# Altium PCB PCB.PcbDoc
Units mm, origin at the board's own origin, x right, y up, seen from the top; angles counter-clockwise.
Board outline 22.01 x 11.01 mm, 2 copper layers (Top Layer, Bottom Layer), stack 0.533 mm thick; 2 components, 6 nets, 34 pads, 12 vias.
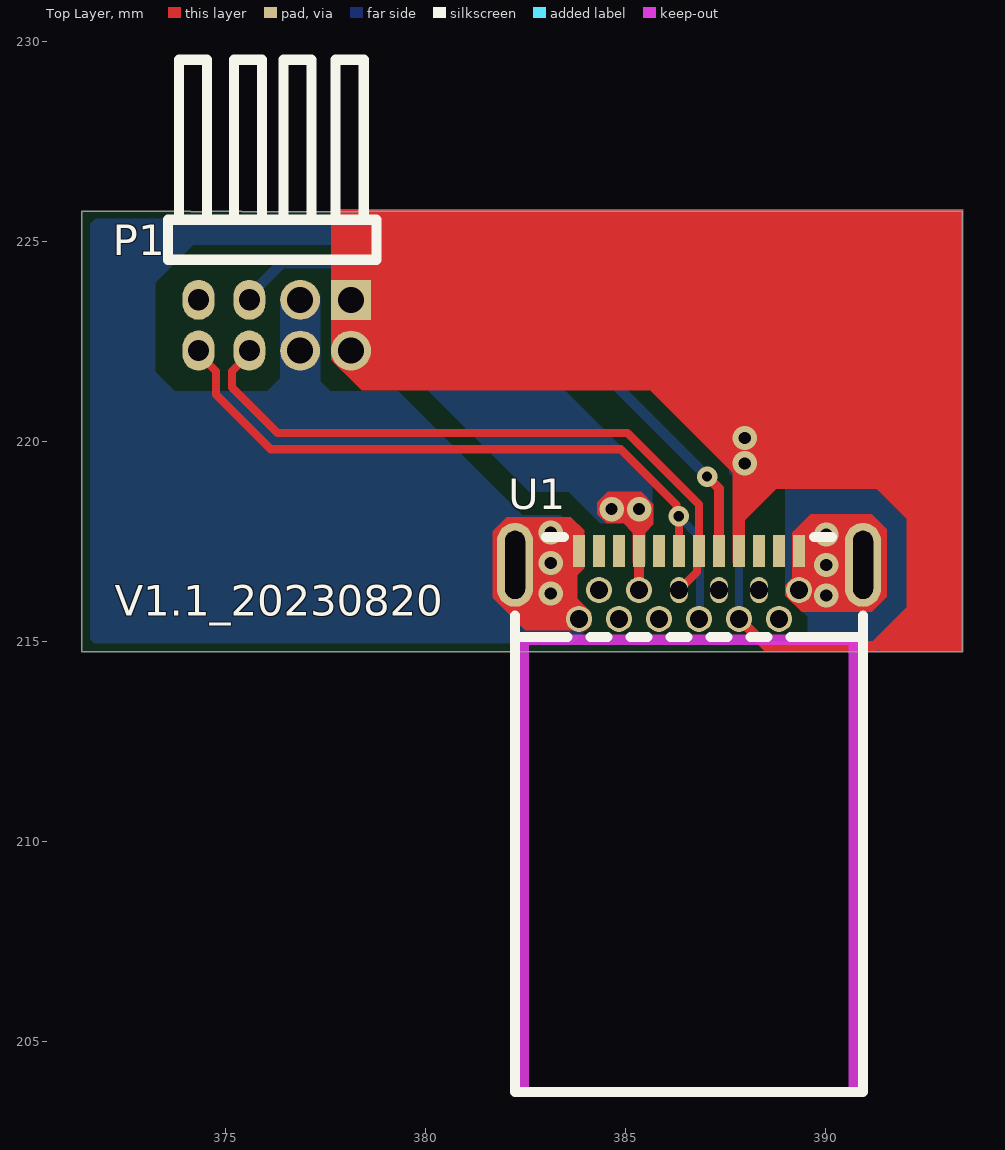
[diagram p0: Top Layer view]
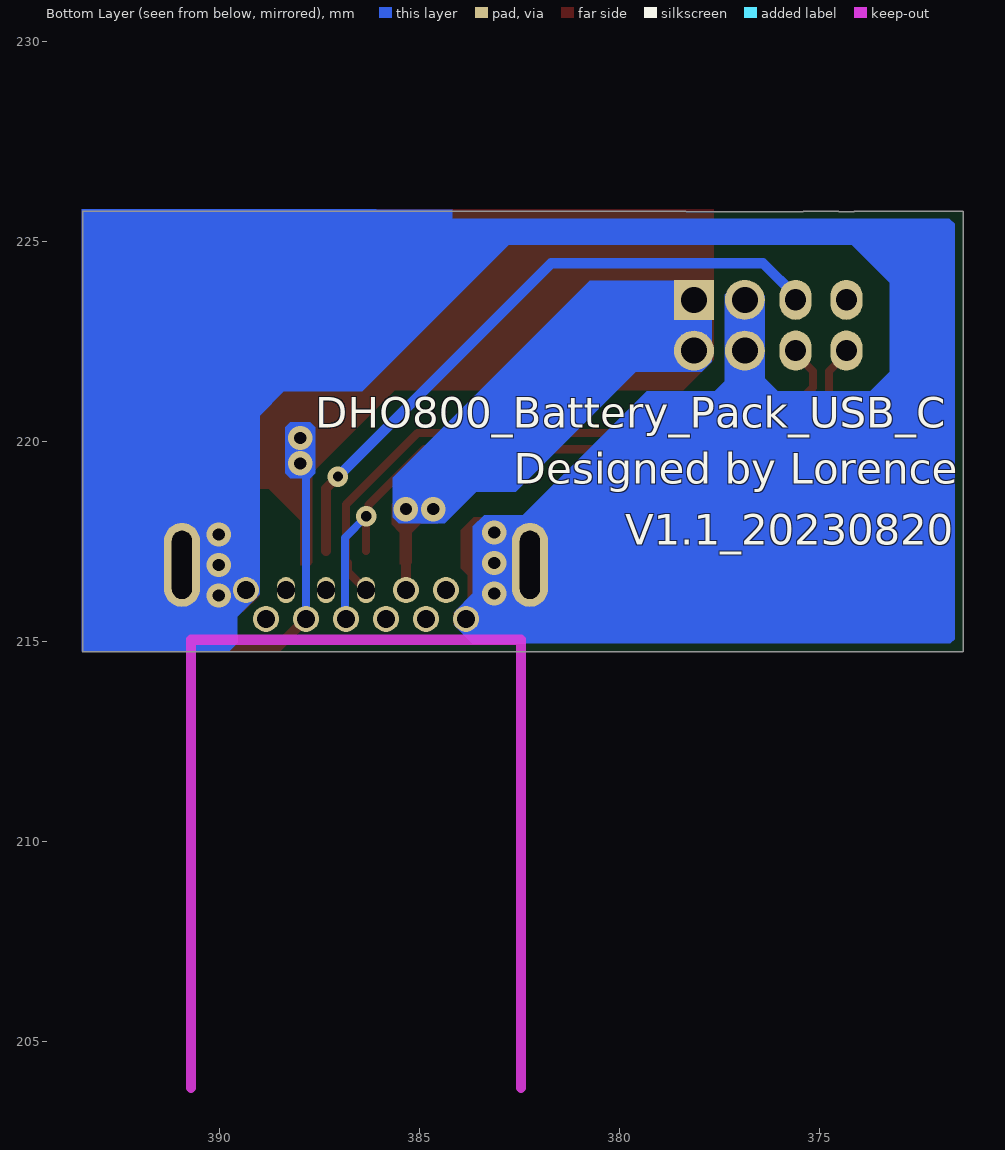
[diagram p1: Bottom Layer view, seen from below]

## Layer stack, top to bottom
Top Solder: solder mask 0.0102, Solder Resist, Dk 3.5
Top Layer: signal copper 0.0356
Dielectric 2: prepreg 0.0711, PP-006, Dk 4.1
Dielectric 1: dielectric 0.32, FR-4, Dk 4.8
Dielectric 3: prepreg 0.0711, PP-006, Dk 4.1
Bottom Layer: signal copper 0.0356
Bottom Solder: solder mask 0.0102, Solder Resist, Dk 3.5

## Board outline
371.412,214.757 ccw(c371.419,214.757) 371.419,214.75 393.419,214.75 ccw(c393.419,214.757) 393.425,214.757 393.425,225.751 ccw(c393.419,225.751) 393.419,225.757 378.341,225.757 ccw(c378.341,225.751) 378.335,225.753 375.408,225.753 ccw(c375.401,225.751) 375.401,225.757 374.531,225.757 ccw(c374.531,225.751) 374.525,225.753 374.137,225.753 ccw(c374.131,225.751) 374.131,225.757 371.419,225.757 ccw(c371.419,225.751) 371.412,225.751

## Design rules (kind name [scope] priority, off if disabled: settings)
Clearance [All] p1: gap=0.102 ignorepadtopadclearanceinfootprint=FALSE
DiffPairsRouting [All] p1: maxlimit=0.203 minlimit=0.203 mostfreqgap=0.203 toplayer_minwidth=0.152 toplayer_maxwidth=0.203 toplayer_prefwidth=0.203 bottomlayer_minwidth=0.152 bottomlayer_maxwidth=0.203 bottomlayer_prefwidth=0.203 maxuncoupledlength=12.7
HoleSize [All] p1: absolutevalues=TRUE maxlimit=25.4 minlimit=0.025 maxpercent=80.000 minpercent=20.000
HoleToHoleClearance [All] p1: gap=0 allowstackedmicrovias=TRUE
MinimumSolderMaskSliver [All] p1: minsoldermaskwidth=0
PlaneConnect [All] p1: planeconnectstyle=Direct reliefexpansion=0.508 reliefentries=4 reliefconductorwidth=0.254 reliefairgap=0.254
PolygonConnect [All] p1: connectstyle=Relief reliefconductorwidth=0.254 reliefentries=4 polygonreliefangle="90 Angle" airgapwidth=0.254
RoutingVias [All] p1: holewidth=0.254 width=0.508 viastyle="Through Hole" minholewidth=0.254 minwidth=0.508 maxholewidth=12.7 maxwidth=12.7
SilkToSilkClearance [All] p1: silktosilkclearance=0
SilkToSolderMaskClearance [IsPad] p1: minsilkscreentomaskgap=0 clearancetoexposedcopper=TRUE
SolderMaskExpansion [All] p1: expansion=0.102 istentingtop=FALSE
Width [All] p1: maxlimit=25.4 minlimit=0.203 preferedwidth=0.254
23 further rules are at their usual default settings.

## Classes and differential pairs
differential pair BUSB: +BUSB_P -BUSB_N

## Components (designator, comment, footprint, x,y, rotation, side; value= is the part's Value field where it differs from the comment)
P1 "X1321WR-2x07J-C40D18" HDR-TH_8P-P1.27-L 376.236,222.911 r180 top locked
U1 "U261-241N-4BC2LS" USB-C-SMD_XKB_U261-241N-4BC2LS 386.592,216.42 r0 top locked

## Footprints (in the part's own frame and the unit in brackets; to place one, negate y for a bottom-side part, rotate by r counter-clockwise, add the part's x,y. Pads: shape width x height; smd on the part's side, far side on the other; paste and mask are expansions set on the pad)
HDR-TH_8P-P1.27-L [mm]
  rect 1x1 hole 0.65: 1(-1.905,-0.635)
  round 1 hole 0.65: 2(-1.905,0.635) 3(-0.635,-0.635) 4(-0.635,0.635)
  oval 0.8x1 hole 0.53: 5(0.635,-0.635) 6(0.635,0.635) 7(1.905,-0.635) 8(1.905,0.635)
  silkscreen extent -2.54,-6.63 2.67,-1.63
USB-C-SMD_XKB_U261-241N-4BC2LS [mm]
  oval 0.9x2.1 hole 0.5 slot 1.7 at 90 deg paste+0 mask+0.05: 25(-4.35,0.5) 26(4.35,0.5)
  rect 0.3x0.8 smd paste-100 mask+0.05: A1(2.75,0.85) A2(2.25,0.85) A3(1.75,0.85) A4(1.25,0.85) A5(0.75,0.85) A6(0.25,0.85) A7(-0.25,0.85) A8(-0.75,0.85) A9(-1.25,0.85) A10(-1.75,0.85) A11(-2.25,0.85) A12(-2.75,0.85)
  round 0.65 hole 0.45 paste+0 mask+0.05: B1(-2.75,-0.85) B3(-1.75,-0.85) B5(-0.75,-0.85) B7(0.25,-0.85) B9(1.25,-0.85) B11(2.25,-0.85)
  round 0.65 hole 0.45 copper offset 0,0 paste+0 mask+0.05: B2(-2.25,-0.13) B4(-1.25,-0.13) B12(2.75,-0.13)
  oval 0.45x0.65 hole 0.45 copper offset 0,0 paste+0 mask+0.05: B6(-0.25,-0.13) B8(0.75,-0.13) B10(1.75,-0.13)
  Keep-Out Layer lines w0.254: -4.125,-1.37 -4.125,-12.575 -4.125,-1.37 ; -4.125,-1.37 4.12,-1.37 ; -4.125,-1.37 4.12,-1.37 ; 4.12,-1.37 4.12,-12.575 4.12,-1.37
  silkscreen extent -4.35,-12.68 4.35,1.2

## Part data
P1: library part 双排插针, "双排弯针2*4P", Current Rating (Max)=1A, JLCPCB Part Class="Extended Part", LCSC Part Name="1.27mm 2x7P 弯插 方针", Manufacturer="XKB Connectivity(中国星坤)", Operating Temperature Range=-40℃~+105℃, Voltage Rating (Max)=250V, Welding Temperature (Max)=260℃, Add into BOM=yes, Circluar Pins/Square Pins=方针, Contact Material=黄铜, Contact Plating=金, Convert to PCB=yes, Device=X1321WR-2x07J-C40D18, Insulation Height=1mm, Length of End Connection Pin=-, Length of Mating Pin=4mm, Manufacturer Part=X1321WR-2x07J-C40D18, Mounting Type=弯插, Name=X1321WR-2x07J-C40D18, Number of Pins=14, Number of Rows=2, Pin Structure=2x7P, Pitch=1.27mm, Row Spacing=1.27mm, Supplier=LCSC, Supplier Footprint=插件,P=1.27mm, Supplier Part=C2881827, Symbol=X1321WR-2X07J-C40D18
U1: "USB C公头", Current Rating - Power (Max)=5A, JLCPCB Part Class="Extended Part", LCSC Part Name="Type-C 公头 沉板", Manufacturer="XKB Connectivity(中国星坤)", Operating Temperature Range=-40℃~+85℃, Welding Temperature (Max)=260℃, Add into BOM=yes, Connector Type=Type-C, Contact Material=铜合金, Contact Plating=金, Convert to PCB=yes, Device=U261-241N-4BC2LS, Gender=公头, Manufacturer Part=U261-241N-4BC2LS, Mounting Style=沉板, Name=U261-241N-4BC2LS, Number of Contacts=24, Number of Ports=1, Standard="USB 3.1", Supplier=LCSC, Supplier Footprint=SMD, Supplier Part=C2880648, Symbol=U261-241N-4BC2LS

## Via types
v1: diameter 0.61, hole 0.305, Top Layer to Bottom Layer, tented both sides, 10 vias
v2: diameter 0.508, hole 0.254, Top Layer to Bottom Layer, tented both sides, 2 vias

## Nets (pads, with @x,y where several pads share a name; then routed paths per layer and width w, separated by ;. In a path a pad name is that pad's centre, name@x,y a point inside that pad or via, vN(x,y) a via of type N, cw(c..) or ccw(c..) an arc to the next point about the centre after c; other vN are vias at no path point)
BUSB_N: P1.8 U1.A7 U1.B7 | length 17.9
  Top Layer w0.203: P1.8 374.331,222.191 374.763,221.759 374.763,221.182 376.133,219.812 384.884,219.812 386.276,218.42 386.276,218.194 386.338,218.131 386.338,217.273 U1.A7
  Bottom Layer w0.203: v2(386.334,218.135) 386.87,217.599 386.87,215.598 U1.B7
BUSB_P: P1.6 U1.A6 U1.B6 | length 16.3
  Top Layer w0.203: P1.6 375.601,222.191 375.169,221.759 375.169,221.35 376.301,220.218 385.052,220.218 386.842,218.428 U1.A6@386.842,217.019 ; U1.B6 386.795,216.742 386.795,216.972 U1.A6@386.837,217.014
CC3: P1.5 U1.A5 | length 16.2
  Top Layer w0.254: P1.5 P1.5@375.601,223.646 ; v2(387.045,219.126) 387.342,218.829 U1.A5
  Bottom Layer w0.254: P1.5 375.601,223.646 376.414,224.46 381.711,224.46 v2(387.045,219.126)
CC4: P1.7 | length 0
  Top Layer w0.254: P1.7@374.305,223.52 P1.7
GND: P1.3 P1.4 U1.25 U1.26 U1.A1 U1.A12 U1.B1 U1.B12
  other v1: 390.025,216.154 383.134,216.205 390.025,216.916 383.134,216.967 390.025,217.678 383.134,217.729
VIN: P1.1 P1.2 U1.A4 U1.A9 U1.B4 U1.B9 | length 17.3
  Top Layer w0.254: U1.B4@385.342,216.29 U1.A9 ; U1.B9 388.528,214.884 391.236,214.884 392.151,215.798 392.151,218.211 390.271,220.091
  Top Layer w0.635: v1(387.985,220.091) 390.271,220.091
  Bottom Layer w0.203: U1.B9 387.842,219.203 387.985,219.346 v1(387.985,219.456)
  other v1: 384.658,218.313 385.343,218.313
pads on no net: U1.A2 U1.A3 U1.A8 U1.A10 U1.A11 U1.B2 U1.B3 U1.B5 U1.B8 U1.B10 U1.B11

## Other copper
Top Layer:
  rectangle net VIN: 384.175,223.901 393.446,225.806
  region net VIN: 385.496,216.941 385.496,217.729 385.699,217.932 385.699,218.44 385.394,218.745 384.556,218.745 384.302,218.491 384.302,218.186 384.531,217.957 384.963,217.957 385.191,217.729 385.191,216.967 385.217,216.941
  region net VIN: 393.446,214.757 391.363,214.757 391.236,214.884 392.151,215.798 392.151,217.957 391.287,218.821 388.772,218.821 387.985,218.034 387.985,216.916 387.731,216.916 387.68,216.967 387.68,219.227 385.623,221.285 378.409,221.285 377.647,222.047 377.647,225.806 393.446,225.806
  region net GND: 383.642,218.11 383.972,217.78 383.972,216.84 383.794,216.662 383.794,216.078 384.15,215.722 384.15,215.417 384.023,215.29 382.499,215.29 381.686,216.103 381.686,217.754 382.041,218.11
  region net GND: 391.541,216.129 391.16,215.748 389.407,215.748 389.001,216.154 389.001,216.408 389.179,216.586 389.179,217.729 389.636,218.186 391.16,218.186 391.541,217.805
Bottom Layer:
  rectangle net GND: 384.175,223.901 393.446,225.806
  region net GND: 373.253,221.742 373.736,221.259 376.047,221.259 376.377,221.59 376.377,223.647 376.682,223.952 377.088,223.952 377.368,223.672 377.368,221.513 377.622,221.259 379.324,221.259 382.422,218.161 383.388,218.161 383.667,217.881 383.667,216.205 384.124,215.748 384.124,215.392 383.692,214.96 371.729,214.96 371.627,215.062 371.627,225.45 371.754,225.577 384.353,225.577 384.607,225.323 384.556,225.273 384.556,224.18 384.454,224.18 383.984,223.71 382.778,224.917 374.193,224.917 373.253,223.977
  region net GND: 389.001,220.65 388.391,221.259 386.436,221.259 383.984,223.71 386.08,225.806 393.446,225.806 393.446,214.757 389.763,214.757 389.56,214.96 389.56,215.621 389.001,216.179 389.001,216.637
  region net VIN: 384.378,217.957 383.591,218.745 382.6,218.745 379.603,221.742 377.952,221.742 377.698,221.996 377.698,223.774 377.952,224.028 380.746,224.028 385.674,219.1 385.674,218.11 385.521,217.957
  region net VIN: 388.239,220.485 388.366,220.358 388.366,219.215 388.239,219.088 387.731,219.088 387.604,219.215 387.604,220.358 387.731,220.485

## Silkscreen, mask and mechanical layers (free items; w line width, h text height)
Top Overlay:
  text "V1.1_20230820" at 372.237,215.646 h0.76
Bottom Overlay:
  text "DHO800_Battery_Pack_USB_C" at 387.604,220.345 h0.76
  text "Designed by Lorence" at 382.651,218.948 h0.76
  text "V1.1_20230820" at 379.857,217.424 h0.76
Top Solder:
  rectangle: 384.175,223.901 393.446,225.806
Bottom Solder:
  rectangle: 384.175,223.901 393.446,225.806
Mechanical 1:
  lines w0.013: 373.896,225.746 378.576,225.746 ; 374.131,225.751 371.419,225.751 371.419,214.757 393.419,214.757 393.419,225.751 378.341,225.751 ; 374.531,225.751 375.401,225.751
Mechanical 2:
  lines w0.013: 372.496,222.076 374.131,222.076 ; 374.131,224.746 374.131,222.676 374.131,222.076 ; 374.131,225.746 374.131,225.951 ; 374.131,227.551 374.131,229.746 374.531,229.746 374.531,227.551 ; 374.531,224.746 374.531,222.676 374.531,222.076 374.331,222.076 374.131,222.076 ; 374.531,225.746 374.531,225.951 ; 375.401,224.746 375.401,222.676 375.401,222.076 375.801,222.076 375.801,222.676 375.801,224.747 ; 375.401,225.746 375.401,225.951 ; 375.401,227.551 375.401,229.746 375.801,229.746 375.801,227.551 ; 375.801,225.747 375.801,225.951 ; 375.801,225.751 376.671,225.751 ; 376.671,224.747 376.671,222.676 376.671,222.076 377.071,222.076 377.071,222.676 377.071,224.746 ; 376.671,225.747 376.671,225.951 ; 376.671,227.551 376.671,229.746 377.071,229.746 377.071,227.551 ; 377.071,225.746 377.071,225.951 ; 377.071,225.751 377.941,225.751 ; 377.071,228.951 377.941,228.951 ; 377.941,224.746 377.941,222.676 377.941,222.076 378.341,222.076 378.341,222.676 378.341,224.747 ; 377.941,225.746 377.941,225.951 ; 377.941,227.551 377.941,229.746 378.341,229.746 378.341,227.551 ; 378.341,225.747 378.341,225.951 ; 378.341,228.951 382.118,228.951 382.118,227.551 ; 381.951,223.346 382.586,223.346 ; 382.151,225.746 382.151,225.951 ; 382.151,227.551 382.151,229.746 ; 387.008,227.551 387.008,231.255 399.008,231.255 399.008,227.551 ; 388.758,225.751 388.758,225.951 ; 389.258,225.751 389.258,225.951 ; 390.758,225.751 390.758,225.951 ; 391.258,225.751 391.258,225.951 ; 392.758,225.751 392.758,225.951 ; 393.258,225.751 393.258,225.951 ; 394.758,225.951 394.758,221.749 395.008,221.749 395.258,221.749 395.258,225.951 ; 396.758,225.951 396.758,221.749 397.008,221.749 397.258,221.749 397.258,225.951 ; 373.896,224.746 378.576,224.746 ; 373.896,224.746 373.696,224.746 373.696,225.746 373.896,225.746 373.896,224.746 ; 378.576,224.746 378.776,224.746 378.776,225.746 378.576,225.746 378.576,224.746 ; 380.858,203.969 380.858,217.719 382.058,217.719 388.358,217.719 389.558,217.719 389.558,203.969 388.358,203.969 382.058,203.969 380.858,203.969
Mechanical 3:
  lines w0.013: 374.131,222.476 374.531,222.476 ; 374.131,223.346 374.531,223.346 ; 374.131,223.746 374.531,223.746 ; 374.131,224.746 374.131,225.746 ; 374.131,225.751 374.531,225.751 ; 374.131,225.951 374.131,227.551 ; 374.531,224.746 374.531,225.746 ; 374.531,225.951 374.531,227.551 ; 375.401,222.476 375.801,222.476 ; 375.401,223.346 375.801,223.346 ; 375.401,223.746 375.801,223.746 ; 375.401,224.746 375.401,225.746 ; 375.401,225.951 375.401,227.551 ; 375.401,225.751 375.801,225.751 ; 375.801,224.747 375.801,225.747 ; 375.801,225.951 375.801,227.551 ; 376.671,222.476 377.071,222.476 ; 376.671,223.346 377.071,223.346 ; 376.671,223.746 377.071,223.746 ; 376.671,224.747 376.671,225.747 ; 376.671,225.751 377.071,225.751 ; 376.671,225.951 376.671,227.551 ; 377.018,227.551 377.018,228.951 377.071,228.951 ; 377.071,224.746 377.071,225.746 ; 377.071,225.951 377.071,227.551 ; 377.941,222.476 378.341,222.476 ; 377.941,223.346 378.141,223.346 378.141,223.546 ; 377.941,223.746 378.341,223.746 ; 377.941,224.746 377.941,225.746 ; 377.941,225.951 377.941,227.551 ; 377.941,225.751 378.341,225.751 ; 377.941,228.951 378.341,228.951 ; 378.341,224.747 378.341,225.747 ; 378.341,225.951 378.341,227.551 ; 382.151,225.951 382.151,227.551 ; 382.586,221.915 382.586,224.746 ; 387.008,227.551 387.008,227.055 399.008,227.055 399.008,227.551 ; 388.758,225.751 388.758,221.749 389.008,221.749 389.258,221.749 389.258,225.751 ; 388.758,225.951 388.758,227.055 ; 389.258,225.951 389.258,227.055 ; 390.758,225.751 390.758,221.749 391.008,221.749 391.258,221.749 391.258,225.751 ; 390.758,225.951 390.758,227.055 ; 391.258,225.951 391.258,227.055 ; 392.758,225.751 392.758,221.749 393.008,221.749 393.258,221.749 393.258,225.751 ; 392.758,225.951 392.758,227.055 ; 393.258,225.951 393.258,227.055 ; 394.758,225.951 394.758,227.055 ; 395.258,225.951 395.258,227.055 ; 396.758,225.951 396.758,227.055 ; 397.258,225.951 397.258,227.055